# EAGLE board fet-switch-smd-16mm-mk-1.1 (EAGLE 9.2.2)
VERSION: v1.1
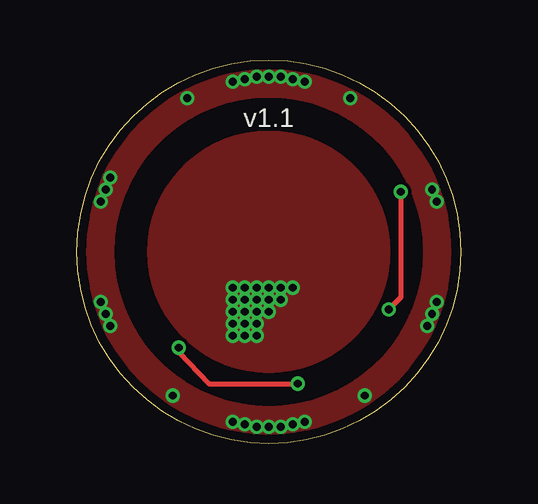
[diagram p0: board, top side]
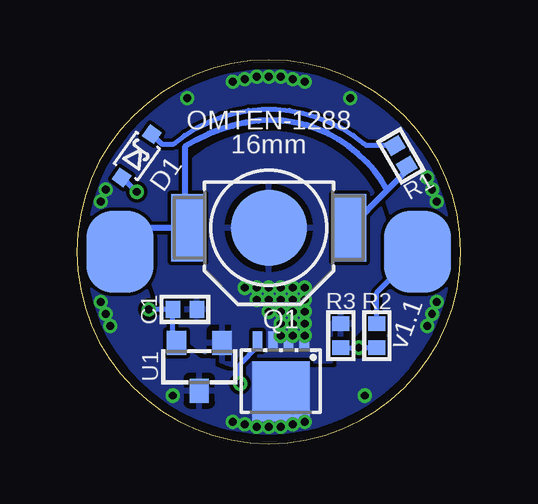
[diagram p1: board, bottom side, seen from below]

Size 16 x 16 mm. Coordinates in mm from the lower left corner, seen from the top.
Outline: 0,8 arc-180 16,8 arc-180 0,8
Copper layers (1*16): Top 0.035559375mm / dielectric 1.6mm / Bottom 0.035559375mm
Design rules "oshpark-2layer": minimum track width 6mil, minimum drill 10mil, track to track 6mil, track to pad 6mil, pad to pad 6mil, via to via 6mil, smd to smd 0mil, copper to edge 15mil, drill to drill 6mil, minimum pad ring 5mil, minimum via ring 5mil, stop-mask expansion 2.5mil, vias tented up to drill 20mil, thermal gap 10mil

## Footprints (pad centres in the part's own frame; a part is rotated, then mirrored left to right if it is on the bottom)
BATTCON_4.8MM = smd 3.18 x 3.18: - 0,0 | smd 1.4 x 2.8: A1 -3.365,0; A2 3.365,0
C0402 = smd 0.6 x 0.7: 1 -0.5,0; 2 0.5,0
SOD323-SCHOTTKY = smd 0.6 x 0.6: A -1.1,0; C 1.1,0
1X01_NOSILK_NOSTOP = drill 0.33: P$1 0,0
LFPAK33 = smd 0.4 x 0.8: 1 -0.975,-1.685; 2 -0.325,-1.685; 3 0.325,-1.685; 4 0.975,-1.685 | smd 2.4 x 2.5: PAD 0,0.415
R0402 = smd 0.6 x 0.7: 1 -0.5,0; 2 0.5,0
OMTEN-1288-LESS2-NS = smd 2.78 x 3.4: 1 -6.2,0; 2 6.2,0
SOT23-TIGHTER = smd 0.8 x 1: 1 -0.95,-1; 2 0.95,-1; 3 0,1

## Placement (x,y rotation side)
BAT1  [BATTCON_4.8MM]  8,9 0 bottom
C1  1uF  [C0402]  11.5,5.6 0 bottom
D1  [SOD323-SCHOTTKY]  13.5,12 55 bottom
FRAME1  FRAME-LETTERNO_PACKAGE  [DUMMY]  0,0 0 top
GND  M01NOT-A-VIA-NOPE  [1X01_NOSILK_NOSTOP]  8,15.3 90 bottom
Q1  LFPAK33  [LFPAK33]  7.5,2.6 180 bottom
R1  2K2  [R0402]  2.5,12 120 bottom
R2  100R  [R0402]  3.5,4.5 270 bottom
R3  1M  [R0402]  5,4.5 270 bottom
SW1  SWITCH-SPSTOMTEN-1288-SMD-NS  [OMTEN-1288-LESS2-NS]  8,8 0 bottom
U1  AP2210N  [SOT23-TIGHTER]  10.9,3.2 180 bottom

## Library data of the parts
BAT1 C1 D1 GND Q1 R1-R3 SW1 U1 = a_parts
FRAME1 = a_parts; DESIGNER: sean@yak.net; VERSION: v1.1

## Nets
CHARGE+: D1.C R1.2
COIN+: BAT1.A1 BAT1.A2 R1.1 SW1.1
GATE: Q1.4 R2.2 R3.2
GND: GND.P$1 Q1.PAD U1.3
PULLUP: R2.1 SW1.2
VBATT-: BAT1.- C1.2 Q1.1 Q1.2 Q1.3 R3.1 U1.1
VOUT: C1.1 D1.A U1.2

## Tracks (layer width: path | path; a pad name or v marks a point on that pad's centre or on a via)
CHARGE+
  Bottom 0.2: R1.2 3.95,12.43 4.02,12.5 arc-80 11.97,12.5 12.47,12.5 D1.C
COIN+
  Bottom 0.25: R1.1 2.25,11.38 3.07,10.57 | 3.07,10.57 BAT1.A2 | 3.07,10.57 arc-60 7.9,13.5 arc-30 11.48,12.4 11.48,9 | BAT1.A1 11.48,9 | 11.48,9 13.2,9 SW1.1
GATE  (via drill 0.33)
  Top 0.2: v4.25,4 4.25,3.8 5.5,2.5 v9.2,2.5
  Bottom 0.2: v9.2,2.5 9.2,3.3 8.47,4.03 Q1.4 | R2.2 v4.25,4 R3.2
GND  (via drill 0.33)
  other vias: 8,0.7 7.5,0.7 7,0.8 6.5,0.9 8.5,0.7 9,0.8 9.5,0.9 7.5,15.3 8.5,15.3 9,15.2 9.5,15.1 7,15.2 6.5,15.1 1.2,10.6 1.4,11.1 1,5.9 1.2,5.4 1.4,4.9 1,10.1 15,5.9 14.8,5.4 14.6,4.9 15,10.1 14.8,10.6 4.6,14.4 11.4,14.4 4,2 12,2
  pour Top (isolate 0.152, rank 6, no thermals): 16,8 arc90 8,16 arc90 0,8 1.5,8 arc-90 8,14.5 arc-90 14.5,8
  pour Top (isolate 0.152, rank 6, no thermals): 0,8 arc90 8,0 arc90 16,8 14.5,8 arc-90 8,1.5 arc-90 1.5,8
  pour Bottom (rank 6): 0,16 0,0 16,0 16,16
PULLUP
  Bottom 0.2: R2.1 3.5,6.3 SW1.2
VBATT-  (via drill 0.33)
  other vias: 8,6.5 7.5,6.5 8.5,6.5 9,6.5 7,6.5 6.5,6.5 6.5,6 7,6 7.5,6 8,6 8.5,6 8,5.5 7.5,5.5 7,5.5 6.5,5.5 6.5,5 6.5,4.5 7,5 7,4.5 7.5,5 7.5,4.5
  pour Top (isolate 0.152, no thermals): 3,8 arc90 8,3 arc90 13,8 arc90 8,13 arc90
  pour Bottom (rank 5): 3,8 arc-90 8,13 arc-90 13,8 arc-90 8,3 arc-90
  pour Bottom (rank 4, no thermals): 5.4,5 9.5,5 9.5,3.4 5.4,3.4
VOUT  (via drill 0.33)
  Top 0.2: v13.5,10.5 13.5,6.1 v13,5.6
  Bottom 0.2: U1.2 12,4.35 C1.1 v13,5.6 | v13.5,10.5 14.1,11.1 D1.A

## Text on the board
bPlace: 16mm | OMTEN-1288